# Altium PCB PCB_RB2_My.PcbDoc (part 2 of 2)
Units mm, origin at the board's own origin, x right, y up, seen from the top; angles counter-clockwise.
Board outline 198 x 170 mm, 2 copper layers (Top, Bottom); 107 components, 89 nets, 429 pads, 145 vias.
Unrouted connection lines stored in the file: 100.
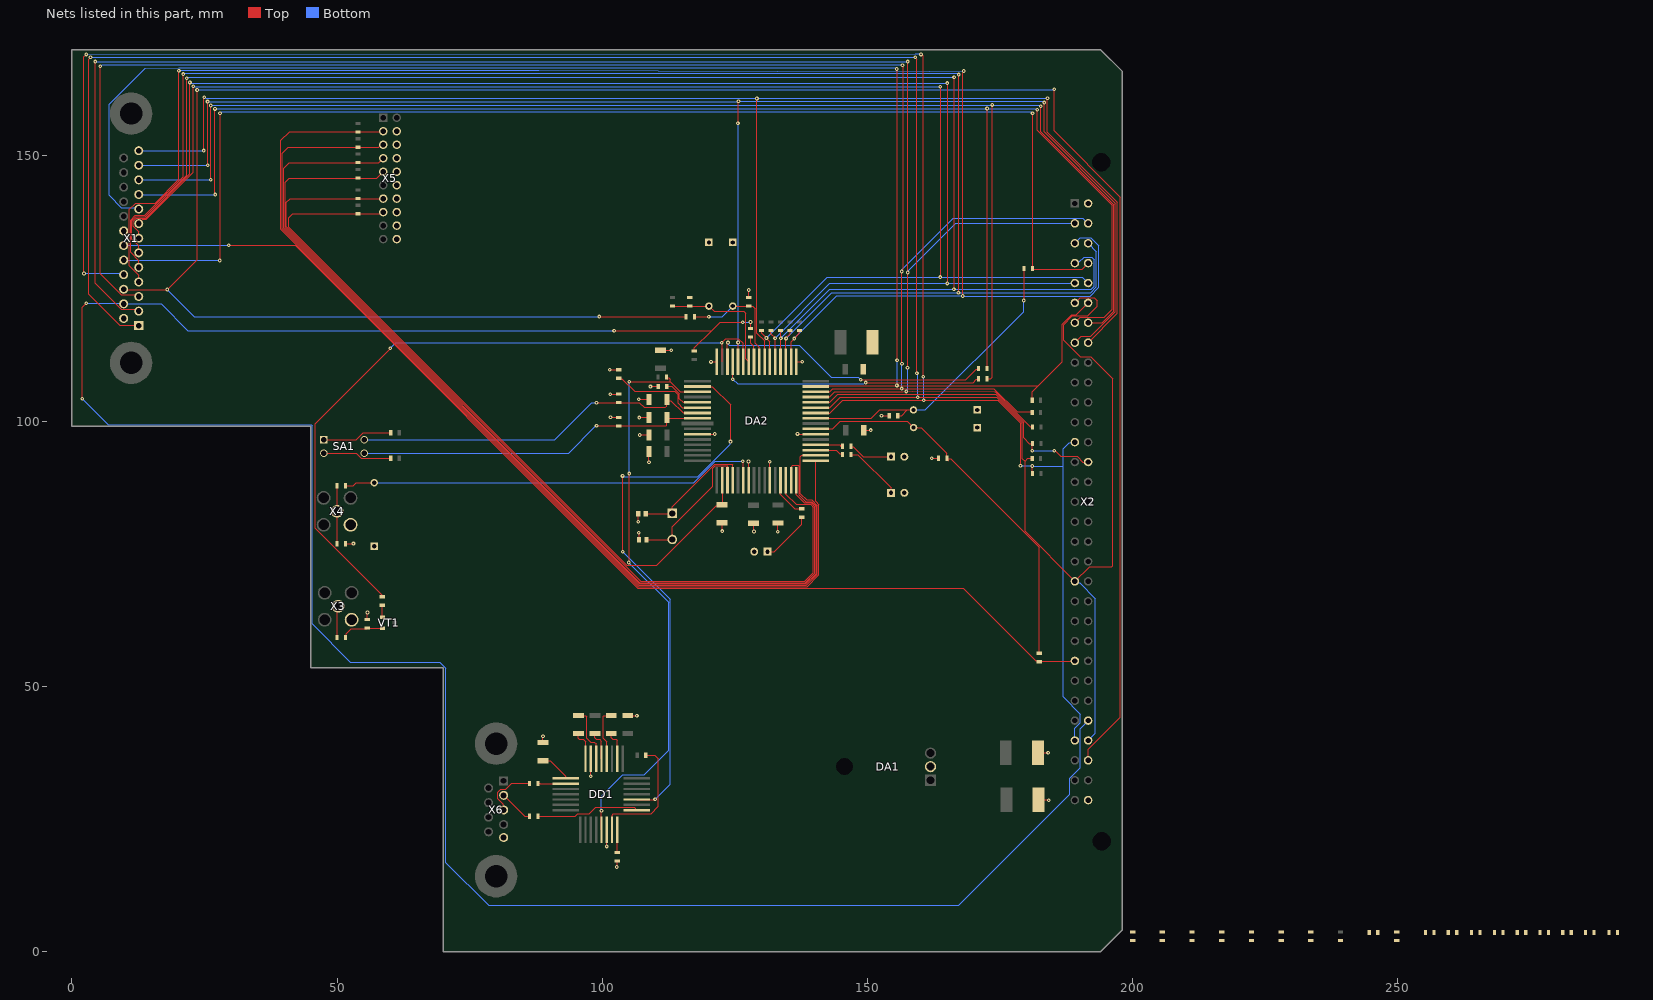
[diagram p2: the nets of this part, all layers, seen from the top]

## Via types
v1: diameter 0.7, hole 0.3, Top to Bottom, 145 vias

## Nets (pads, with @x,y where several pads share a name; then routed paths per layer and width w, separated by ;. In a path a pad name is that pad's centre, name@x,y a point inside that pad or via, vN(x,y) a via of type N, cw(c..) or ccw(c..) an arc to the next point about the centre after c; other vN are vias at no path point) (continued)
"+27В вкл. 2мкс": R13.2 R36.1 X2.24A | length 211.9
  Top w0.125: v1(29.55,133.15) 42.075,133.15 106.7,68.525 168.025,68.525 181.761,54.789 182.236,54.789 R36.1@182.375,54.65 182.45,54.725 189.025,54.725 X2.24A@189.1,54.8
  Bottom w0.125: 9.76,133.125 29.525,133.125 v1(29.55,133.15)
GND: C1.2 C2.2 C3.2 C4.2 C5.2 C6.1 C7.1 C8.2 C9.2 C10.2 C11.2 C12.2 C13.2 C14.2 C15.2 C17.1 C19.1 DA1.2 DA2.3 DA2.15 DA2.19 DA2.30 DA2.41 DA2.56 DD1.2 DD1.15 R22.1 R24.1 R40.2 R41.2 R42.2 R43.2 R51.1 R52.1 R53.1 R54.2 R65.1 VD1.1 VD2.1 VD3.1 VD4.1 VD5.1 VD6.2 VD7.2 VD8.2 X1.20 X2.1B X2.31B X3.2 X4.2 X5.4 X5.6 X5.8 X5.10 X5.12 X5.14 X5.16 X5.18 X5.20 X6.5 | length 62.5
  Top w0.125: R22.1@51.6,76.9 53.05,76.9 v1(53.075,76.925) ; R24.1@55.7,62.6 55.7,63.9 v1(55.725,63.925) ; C17.1@88.8,39.4 88.8,40.55 v1(88.825,40.575) ; DD1.2@97.84,36.35 97.84,33.06 v1(97.85,33.05) ; DD1.15@100.84,22.97 100.84,19.835 v1(100.85,19.825) ; v1(101.4,109.7) R54.2@103.1,109.7 ; v1(101.475,105.075) 101.5,105.1 R52.1@103.1,105.1 ; v1(101.55,100.725) 101.575,100.7 R53.1@103.1,100.7 ; v1(102.75,15.95) 102.8,16 R65.1@102.8,17.1 ; C19.1@104.8,44.5 106.5,44.5 v1(106.525,44.475) ; v1(106.8,81.025) 106.825,81.05 106.825,82.55 C9.2@106.8,82.575 ; v1(106.875,104.125) 106.9,104.1 C6.1@108.8,104.1 ; v1(106.9,78.95) 106.925,78.925 C8.2@106.925,77.65 ; v1(106.95,100.675) 106.975,100.7 C7.1@108.8,100.7 ; v1(107.05,97.4) C10.2@108.8,97.4 ; v1(108.8,92.25) C3.2@108.8,94.3 ; v1(109.075,106.525) 109.1,106.55 R51.1@110.55,106.55 ; C13.2@111,113.4 v1(112.975,113.4) ; DA2.3@117.95,97.55 121.175,97.55 v1(121.2,97.575) ; v1(120.5,111.175) 120.525,111.2 DA2.56@121.6,111.2 ; C15.2@122.601,80.841 122.601,79.299 v1(122.625,79.275) ; v1(127.575,92.4) 127.6,92.375 DA2.15@127.6,88.9 ; R41.2@127.6,123.3 127.6,124.7 v1(127.625,124.725) ; C12.2@128.525,80.775 128.525,79.275 v1(128.6,79.2) ; v1(131.575,92.375) 131.6,92.35 DA2.19@131.6,88.9 ; v1(133.075,79.175) 133.1,79.2 C5.2@133.1,80.8 ; DA2.41@136.6,111.2 137.65,111.2 v1(137.675,111.225) ; v1(136.8,97.6) 136.85,97.55 DA2.30@140.25,97.55 ; C11.2@149.3,98.3 150.6,98.3 v1(150.625,98.325) ; v1(152.65,101.05) 153.9,101.05 R42.2@154.1,101.25 ; v1(162.1,93) R43.2@163.4,93 ; C2.2@182.125,37.5 184.025,37.5 v1(184.05,37.475) ; C1.2@182.225,28.6 184.125,28.6 v1(184.2,28.525)
NetC6_2: C6.2 DA2.63 R52.2 SA1.2 | length 68.5
  Top w0.125: v1(98.9,103.5) R52.2@103.1,103.5 107,103.5 107.9,102.6 111.9,102.6 112.143,102.843 112.143,104.043 C6.2@112.2,104.1 112.432,103.868 112.932,103.868 115.218,101.582 117.918,101.582 DA2.63@117.95,101.55
  Bottom w0.125: SA1.2@55.12,96.5 91,96.5 98,103.5 v1(98.9,103.5)
NetC7_2: C7.2 DA2.64 R53.2 SA1.4 | length 66.6
  Top w0.125: v1(98.925,99.125) 102.575,99.125 102.6,99.1 R53.2@103.1,99.1 112.051,99.1 112.2,99.249 C7.2@112.2,100.7 112.35,100.55 DA2.64@117.95,100.55
  Bottom w0.125: SA1.4@55.12,93.96 93.635,93.96 98.775,99.1 98.9,99.1 v1(98.925,99.125)
NetC8_1: C8.1 DA2.11 ZQ1.2 | length 27.2
  Top w0.125: C8.1@108.325,77.65 108.35,77.675 113.175,77.675 ZQ1.2@113.2,77.7 113.2,80.1 120.825,87.725 120.825,91.14 121.285,91.6 123.552,91.6 123.625,91.527 123.625,88.925 DA2.11@123.6,88.9
NetC9_1: C9.1 DA2.12 ZQ1.1 | length 23.9
  Top w0.125: C9.1@108.2,82.575 113.175,82.575 ZQ1.1@113.2,82.6 113.2,83.869 121.169,91.838 121.188,91.838 121.2,91.85 124.527,91.85 124.6,91.777 DA2.12@124.6,88.9
NetC15_1: C15.1 DA2.10 R57.2 X5.15 | length 137.7
  Top w0.125: X5.15@58.7,139.42 58.418,139.138 53.988,139.138 R57.2@53.95,139.1 41.65,139.1 40.875,138.325 40.875,136.575 104.638,72.812 110.262,72.812 121.462,84.012 122.372,84.012 122.725,84.365 122.725,88.775 DA2.10@122.6,88.9
NetC16_1: C16.1 DD1.28 | length 5.6
  Top w0.125: C16.1@98.6,41.1 98.6,40.3 98.9,40 99.5,40 99.84,39.66 DD1.28@99.84,36.35
NetC17_2: C17.2 DD1.4 | length 6
  Top w0.125: C17.2@88.8,36 90.2,36 93.132,33.068 93.132,32.678 DD1.4@93.15,32.66
NetC18_1: C18.1 DD1.1 | length 10.8
  Top w0.125: C18.1@95.5,44.5 96.9,44.5 97.1,44.3 97.1,40.2 97.8,39.5 98.5,39.5 98.84,39.16 DD1.1@98.84,36.35
NetC18_2: C18.2 DD1.3 | length 5.7
  Top w0.125: C18.2@95.5,41.1 95.5,40.2 95.7,40 96.4,40 96.84,39.56 DD1.3@96.84,36.35
NetC20_1: C20.1 DD1.27 | length 9.8
  Top w0.125: DD1.27@100.84,36.35 100.84,39.56 100.2,40.2 100.2,44.383 100.317,44.5 C20.1@101.7,44.5
NetC20_2: C20.2 DD1.25 | length 5.6
  Top w0.125: C20.2@101.7,41.1 101.7,40.3 102,40 102.6,40 102.84,39.76 DD1.25@102.84,36.35
NetDA2_14: DA2.14 R23.2 VD1.2 | length 80.4
  Top w0.125: R23.2@51.6,87.8 53,87.8 53.6,88.4 VD1.2@57,88.4 ; v1(126.475,92.45) 126.585,92.34 126.585,92.104 126.6,92.089 DA2.14@126.6,88.9
  Bottom w0.125: VD1.2@57,88.4 117.26,88.4 121.31,92.45 v1(126.475,92.45)
NetDA2_21: DA2.21 R50.1 | length 7.8
  Top w0.125: DA2.21@133.6,88.9 133.583,88.883 133.583,86.217 136.3,83.5 R50.1@137.6,83.5
NetDA2_22: DA2.22 R62.2 X5.13 | length 172.1
  Top w0.125: X5.13@58.7,141.96 58.685,141.975 R62.2@53.95,141.975 41.15,141.975 40.45,141.275 40.45,136.638 107.238,69.85 138.214,69.85 139.8,71.436 139.8,83.789 139.289,84.3 136.525,84.3 134.6,86.225 DA2.22@134.6,88.9
NetDA2_23: DA2.23 R58.2 X5.7 | length 186.2
  Top w0.125: X5.7@58.7,149.58 57.87,148.75 R58.2@53.95,148.75 40.98,148.75 39.95,147.72 39.95,136.354 106.979,69.325 138.396,69.325 140.3,71.229 140.3,83.996 139.471,84.825 138.35,84.825 137.1,86.075 137.1,91.475 136.9,91.675 135.875,91.675 135.714,91.514 135.714,89.014 DA2.23@135.6,88.9
NetDA2_24: DA2.24 R59.2 X5.9 | length 175.9
  Top w0.125: X5.9@58.7,147.04 57.51,145.85 R59.2@53.95,145.85 41,145.85 40.2,145.05 40.2,136.475 107.1,69.575 138.293,69.575 140.05,71.332 140.05,83.893 139.368,84.575 138.125,84.575 136.6,86.1 DA2.24@136.6,88.9
NetDA2_25: DA2.25 R60.2 X5.3 | length 188.8
  Top w0.125: X5.3@58.7,154.66 58.59,154.55 R60.2@53.925,154.55 41.039,154.55 39.414,152.925 39.414,136.164 106.754,68.825 138.625,68.825 140.8,71 140.8,84.275 140.2,84.875 140.2,92.5 DA2.25@140.25,92.55
NetDA2_26: DA2.26 R61.2 X5.5 | length 190.5
  Top w0.125: X5.5@58.68,152.1 X5.5@58.7,152.12 58.359,152.12 57.889,151.65 R61.2@53.925,151.65 40.825,151.65 39.7,150.525 39.7,136.25 106.875,69.075 138.5,69.075 140.55,71.125 140.55,84.1 139.475,85.175 138.525,85.175 137.35,86.35 137.35,93.25 137.636,93.536 140.236,93.536 DA2.26@140.25,93.55
NetDA2_27: DA2.27 R48.1 | length 5.4
  Top w0.125: DA2.27@140.25,94.55 144.15,94.55 144.817,93.883 145.117,93.883 R48.1@145.3,93.7
NetDA2_28: DA2.28 R49.1 | length 5.2
  Top w0.125: DA2.28@140.25,95.55 144.75,95.55 145,95.3 R49.1@145.3,95.3
NetDA2_31: DA2.31 R36.2 R43.1 VD5.2 | length 73.8
  Top w0.125: DA2.31@140.25,98.55 143.45,98.55 144.875,99.975 157.525,99.975 VD5.2@158.7,98.8 160.1,98.8 164.986,93.914 R43.1@164.986,93.014 ; R43.1@164.886,93.114 R43.1@164.986,93.014 ; R43.1@164.986,92.857 R43.1@164.986,93.014 ; R43.1@165.237,92.571 165,92.809 R43.1@165,92.904 ; R36.2@182.375,56.25 182.375,76.225 165.696,92.904 R43.1@165,92.904 ; R43.1@164.986,93.014 R43.1@165,93 R43.1@165,92.904
NetDA2_33: DA2.33 R35.2 R42.1 VD4.2 | length 58
  Top w0.125: DA2.33@140.25,100.55 150.75,100.55 152.325,102.125 157.525,102.125 ; R42.1@155.7,101.05 155.725,101.025 156.425,101.025 157.525,102.125 ; VD4.2@158.675,102.125 157.525,102.125 ; v1(179.45,122.75) 179.525,122.825 R35.2@179.525,128.775
  Bottom w0.125: VD4.2@158.675,102.125 160.925,102.125 179.45,120.65 v1(179.45,122.75)
NetDA2_48: DA2.48 R34.2 R41.1 VD3.2 | length 22.8
  Top w0.125: R34.2@117.375,119.7 v1(120.1,119.7) ; VD3.2@124.6,121.7 127.1,121.7 R41.1@127.6,121.7 128.375,121.7 128.85,121.225 128.85,114.7 129.575,113.975 129.575,111.225 DA2.48@129.6,111.2
  Bottom w0.125: v1(120.1,119.7) 122.6,119.7 VD3.2@124.6,121.7
NetDA2_49: DA2.49 R33.2 | length 4.9
  Top w0.125: R33.2@128,115.85 128,114.7 128.6,114.1 DA2.49@128.6,111.2
NetDA2_50: DA2.50 R32.2 R40.1 VD2.2 | length 23.7
  Top w0.125: R32.2@113.25,121.7 R40.1@116.5,121.7 117,121.7 VD2.2@120.1,121.7 121.1,120.7 126.702,120.7 127.038,120.364 127.038,111.762 DA2.50@127.6,111.2
NetDA2_51: DA2.51 R25.1 | length 132.8
  Top w0.125: R25.1@58.614,67.014 R25.1@58.5,66.9 58.386,67.014 58.386,67.314 45.9,79.8 45.9,99.55 60.025,113.675 v1(60.025,113.725) ; 122.6,111.2 122.6,114.75 v1(122.55,114.8) 123.3,115.55 125.648,115.55 126.55,114.648 126.55,111.25 DA2.51@126.6,111.2
  Bottom w0.125: v1(60.025,113.725) 61.1,114.8 v1(122.55,114.8)
NetDA2_53: DA2.53 R31.2 | length 50.4
  Top w0.125: v1(124.6,107.925) DA2.53@124.6,111.2 ; v1(149.675,107.275) 169.95,107.275 170.536,107.861 170.836,107.861 R31.2@170.95,107.975
  Bottom w0.125: v1(124.6,107.925) 125.5,107.025 149.314,107.025 149.564,107.275 v1(149.675,107.275)
NetDA2_54: DA2.54 R30.2 | length 54.9
  Top w0.125: DA2.54@123.6,111.2 123.6,114.725 v1(123.7,114.825) ; v1(148.75,107.8) 148.763,107.813 168.538,107.813 170.536,109.811 170.836,109.811 R30.2@170.95,109.925
  Bottom w0.125: v1(123.7,114.825) 123.81,114.715 123.81,114.397 123.907,114.3 137.125,114.3 143.175,108.25 148.3,108.25 v1(148.75,107.8)
NetDA2_58: DA2.58 DD1.20 | length 107.3
  Top w0.125: v1(103.825,89.675) 103.825,75.4 v1(103.85,75.375) ; DD1.20@106.53,28.66 109.91,28.66 v1(109.95,28.7) ; DA2.58@117.95,106.55 117.975,106.525 120.75,106.525 124.175,103.1 v1(124.175,96.15)
  Bottom w0.125: v1(103.825,89.675) 103.935,89.565 104.176,89.565 104.186,89.555 118.005,89.555 124.136,95.686 124.136,96.111 v1(124.175,96.15) ; v1(103.85,75.375) 112.825,66.4 112.825,31.575 v1(109.95,28.7)
NetDA2_59: DA2.59 DD1.14 R64.1 | length 110.6
  Top w0.125: DD1.14@99.84,22.97 99.825,22.985 99.825,26.525 v1(99.85,26.55) ; v1(105,73.35) 105.075,73.425 v1(105.075,90.125) ; v1(105.075,107.45) 105.1,107.425 112.8,107.425 ; R64.1@112.125,108.155 R64.1@112.362,107.917 ; R64.1@112.125,108.325 112.239,108.211 112.539,108.211 112.8,107.95 112.8,107.425 ; DA2.59@117.95,105.55 114.7,105.55 112.813,107.437 112.8,107.425
  Bottom w0.125: v1(99.85,26.55) 99.85,29.325 103.825,33.3 107.875,33.3 112.525,37.95 112.525,65.825 v1(105,73.35) ; v1(105.075,90.125) v1(105.075,107.45)
NetDA2_61: DA2.61 R51.2 | length 7.5
  Top w0.125: R51.2@112.15,106.55 113.129,106.55 114.55,105.129 114.55,104.262 115.262,103.55 DA2.61@117.95,103.55
NetDA2_62: DA2.62 R54.1 | length 18.1
  Top w0.125: R54.1@103.1,108.1 103.214,107.986 103.714,107.986 106.075,105.625 113.7,105.625 114.3,105.025 114.3,103.35 115.1,102.55 DA2.62@117.95,102.55
NetDD1_5: DD1.5 R66.1 | length 5.3
  Top w0.125: R66.1@87.9,31.7 88.2,31.7 88.24,31.66 DD1.5@93.15,31.66
NetDD1_16: DD1.16 R63.2 | length 23.8
  Top w0.125: DD1.16@101.84,22.97 101.84,25.74 102.1,26 109.2,26 110.55,27.35 110.55,36.333 109.883,37 R63.2@108.2,37
NetDD1_17: DD1.17 R65.2 | length 4.3
  Top w0.125: R65.2@102.8,18.7 102.84,18.74 DD1.17@102.84,22.97
NetDD1_18: DD1.18 R67.1 | length 19.6
  Top w0.125: R67.1@87.9,25.5 94.9,25.5 95.4,26 97.55,26 98.75,27.2 105.99,27.2 DD1.18@106.53,26.66
NetR1_1: R1.1 X1.1
NetR2_1: R2.1 X1.2
NetR3_1: R3.1 X1.3
NetR4_1: R4.1 X1.4
NetR5_1: R5.1 X1.5
NetR6_1: R6.1 X1.6
NetR7_1: R7.1 X1.7
NetR8_1: R8.1 X1.8
NetR9_1: R9.1 X1.9
NetR10_1: R10.1 X1.10
NetR11_1: R11.1 X1.11
NetR12_1: R12.1 X1.12
NetR13_1: R13.1 X1.13
NetR14_1: R14.1 X1.14
NetR15_1: R15.1 X1.15
NetR16_1: R16.1 X1.16
NetR17_1: R17.1 X1.17
NetR18_1: R18.1 X1.18
NetR19_1: R19.1 X1.19
NetR21_1: R21.1 X3.1 | length 5.8
  Top w0.125: R21.1@50,59.2 X3.1@50,65
NetR21_2: R21.2 R24.2 VT1.3 | length 8
  Top w0.125: R21.2@51.6,59.2 51.715,59.315 51.715,59.915 52.7,60.9 55.6,60.9 R24.2@55.7,61 VT1.3@58.55,61
NetR22_2: R22.2 R23.1 X4.1 | length 10.9
  Top w0.125: R22.2@50,76.9 X4.1@50,83 R23.1@50,87.8
NetR25_2: R25.2 VT1.2 | length 2.3
  Top w0.125: VT1.2@58.55,63 R25.2@58.55,65.3
NetR48_2: R48.2 VD8.1 | length 11.1
  Top w0.125: R48.2@146.9,93.7 148.175,93.7 154.45,87.425 VD8.1@154.45,86.5
NetR49_2: R49.2 VD7.1 | length 8.4
  Top w0.125: R49.2@146.9,95.3 147.014,95.186 147.314,95.186 149.2,93.3 VD7.1@154.45,93.3
NetR50_2: R50.2 VD6.1 | length 9.9
  Top w0.125: VD6.1@131.15,75.4 132.45,75.4 137.6,80.55 R50.2@137.6,81.9
NetR55_1: R55.1 SA1.1 | length 13.3
  Top w0.125: SA1.1@47.5,96.5 53.6,96.5 54.9,97.8 R55.1@60.3,97.8
NetR56_1: R56.1 SA1.3 | length 13.4
  Top w0.125: SA1.3@47.5,93.96 53.64,93.96 54.565,93.035 60.1,93.035 60.3,92.835 R56.1@60.3,92.7
NetR66_2: R66.2 X6.3 | length 10.5
  Top w0.125: X6.3@81.4,26.7 81.336,26.764 81.336,27.733 80.3,28.769 80.3,30 80.876,30.576 81.794,30.576 82.475,31.257 82.475,31.275 82.9,31.7 R66.2@86.3,31.7
NetR67_2: R67.2 X6.2 | length 6.5
  Top w0.125: X6.2@81.4,29.45 85.35,25.5 R67.2@86.3,25.5
"Внеш. зап. 15В": R10.2 R34.1 X2.29B | length 444.1
  Top w0.125: 9.76,124.875 9.81,124.825 v1(18,124.825) 23.625,130.45 23.625,162.425 v1(23.6,162.45) ; v1(99.45,119.725) 99.475,119.7 R34.1@115.775,119.7 ; v1(185.225,162.6) 185.175,162.55 185.175,154.725 197.688,142.212 197.688,44.188 191.6,38.1 X2.29B@191.6,36.05
  Bottom w0.125: v1(18,124.825) 23.1,119.725 v1(99.45,119.725) ; v1(23.6,162.45) 184.919,162.45 185.069,162.6 v1(185.225,162.6)
"Внеш. зап. лог. 1": DA2.34 R11.2 R20.1 X2.13A X2.28A | length 390.6
  Top w0.125: v1(2.275,127.85) 2.275,168.668 2.7,169.093 v1(2.7,169.15) ; DA2.34@140.25,101.55 140.275,101.525 142.9,101.525 145.312,103.937 160.587,103.937 v1(160.6,103.95) 160.625,103.925 174.611,103.925 174.647,103.888 178.925,99.611 178.925,91.65 v1(178.85,91.575) ; v1(160.084,169.15) 160.194,169.04 160.47,169.04 160.55,168.96 160.55,108.425 v1(160.525,108.4) ; v1(181.075,91.55) 181.05,91.525 181.05,90.175 R20.1@181.1,90.125
  Bottom w0.125: v1(2.275,127.85) 9.535,127.85 9.76,127.625 ; v1(2.7,169.15) 159,169.237 ; 159,169.238 159.03,169.238 ; 159.031,169.237 159.997,169.237 v1(160.084,169.15) ; v1(160.525,108.4) 160.6,108.325 v1(160.6,103.95) ; v1(178.85,91.575) 178.875,91.55 181.025,91.55 181.05,91.525 186.9,91.525 ; X2.28A@189.1,39.8 189.1,42.062 190.152,43.114 190.152,44.76 186.9,48.012 186.9,91.525 ; X2.13A@189.1,96.05 188.993,95.943 188.068,95.943 186.9,94.775 186.9,91.525
"Имп. 0": DA2.37 R1.2 R29.1 X2.2A | length 347.7
  Top w0.125: v1(4.4,167.8) 4.4,126.018 9.33,121.087 11.739,121.087 11.775,121.051 12.299,121.051 12.6,120.75 ; DA2.37@140.25,104.55 140.289,104.589 142.864,104.589 143.862,105.587 156.725,105.587 v1(157.325,105.613) ; v1@157.313,105.587 v1(157.325,105.613) ; v1(157.55,110.05) 157.575,110.075 v1(157.575,128.025) 157.6,128.05 v1(157.6,167.8) ; R29.1@181.1,98.9 181.05,98.95 180.646,98.95 174.058,105.538 174.021,105.575 158.427,105.612 ccw(c158.425,105.075) 158.404,105.612 157.466,105.575 157.363,105.575 v1(157.325,105.613) ; X2.2A@189.1,137.3 X2.2A@189.499,137.3
  Bottom w0.125: v1(4.4,167.8) 4.46,167.74 157.54,167.74 v1(157.6,167.8) ; v1(157.325,105.613) 157.325,105.723 157.575,105.973 157.575,110.025 v1(157.55,110.05) ; v1(157.575,128.025) 157.685,128.135 157.685,128.385 166.6,137.3 X2.2A@189.1,137.3
"Имп. 1": DA2.38 R14.2 R37.1 X2.2B | length 343.3
  Top w0.125: v1(5.35,166.912) 5.35,127.818 9.33,123.837 11.739,123.837 11.775,123.801 12.299,123.801 12.6,123.5 ; DA2.38@140.25,105.55 140.261,105.539 142.864,105.539 143.475,106.15 v1(156.475,106.15) 173.8,106.15 178.211,101.739 180.936,101.739 R37.1@181.05,101.625 ; v1(156.5,110.825) 156.5,128.188 v1(156.463,128.225) 156.463,128.381 156.775,128.693 156.775,166.769 156.6,166.944 v1(156.6,167.1) ; R37.1@180.911,101.639 R37.1@180.95,101.6
  Bottom w0.125: v1(5.35,166.912) 5.506,166.912 5.756,167.163 156.537,167.163 v1(156.6,167.1) ; v1@156.46,128.56 166.188,138.288 190.612,138.288 X2.2B@191.6,137.3 ; v1(156.475,106.15) 156.475,110.8 v1(156.5,110.825)
"Имп. 1 ПРД 1к": R6.2 R30.1 X2.7A | length 286.4
  Top w0.125: v1(26.975,158.875) 26.975,142.775 v1(27.025,142.725) ; R30.1@172.55,109.95 v1(172.55,158.95) ; v1@182,158.775 v1(182,158.725) 182,154.85 196.161,140.689 196.161,140.586 196.15,140.575 196.15,121.1 194.65,119.6 190.15,119.6 X2.7A@189.1,118.55
  Bottom w0.125: 12.6,142.75 12.625,142.725 v1(27.025,142.725) ; v1(26.975,158.875) 27.043,158.943 181.639,158.943 181.857,158.725 v1(182,158.725)
"Имп. 1 ПРД 2к": R19.2 R31.1 X2.7B | length 286.8
  Top w0.125: v1(26.175,145.5) v1(26.175,159.525) ; R31.1@172.55,107.975 173.2,107.975 173.525,108.3 173.525,159.6 v1(173.5,159.625) ; v1@182.675,159.45 v1(182.675,159.4) 182.675,154.575 196.43,140.82 196.43,120.755 194.225,118.55 X2.7B@191.6,118.55
  Bottom w0.125: 12.6,145.5 v1(26.175,145.5) ; v1(26.175,159.525) 26.237,159.587 182.332,159.587 182.519,159.4 v1(182.675,159.4)
"Имп. 2": DA2.42 R2.2 R39.1 X2.3A | length 318.8
  Top w0.125: 12.6,126.25 12.6,127.533 10.812,129.32 10.812,139.912 12,141.1 15.675,141.1 20.175,145.6 v1(20.175,166.087) ; DA2.42@135.6,111.2 135.6,115 136.175,115.575 v1(136.2,115.575) 137.168,116.543 137.168,116.863 137.4,117.095 R39.1@137.4,117.1 ; v1(167.975,123.6) 167.975,165.719 168.125,165.869 v1(168.125,166.025)
  Bottom w0.125: v1(20.175,166.087) 20.25,166.162 88.001,166.162 88.039,166.124 155.498,165.863 ccw(c155.5,166.4) 155.509,165.863 167.959,166.087 168.062,166.087 168.099,166.051 v1(168.125,166.025) ; v1(136.2,115.575) 136.2,115.675 144.163,123.637 167.938,123.637 v1(167.975,123.6) 192,123.6 193.625,125.225 193.625,133.1 192.123,134.602 190.152,134.602 X2.3A@189.1,133.55
"Имп. 3": DA2.43 R15.2 R44.1 X2.3B | length 307.3
  Top w0.125: 12.6,129 12.6,130.283 11.062,131.82 11.062,137.887 11.963,138.788 13.716,138.788 20.975,146.046 v1(20.975,165.45) ; DA2.43@134.6,111.2 v1@134.6,115.6 ; v1@134.6,115.7 135.4,116.5 R44.1@135.4,117.1 ; v1(167.15,124.225) 167.2,124.275 v1(167.2,165.35)
  Bottom w0.125: v1(20.975,165.45) 21.085,165.56 21.308,165.56 21.336,165.587 166.839,165.587 167.077,165.35 v1(167.2,165.35) ; v1(134.65,115.6) 143.275,124.225 v1(167.15,124.225) 167.175,124.2 192.064,124.2 193.175,125.311 193.175,131.975 X2.3B@191.6,133.55
"Имп. 3МГц": DA2.35 R5.2 R26.1 X2.6A X2.20A X2.28B | length 458.8
  Top w0.125: v1(3.5,168.6) 3.5,168.543 3.2,168.243 3.2,123.95 9.05,118.1 12.5,118.1 12.6,118 ; DA2.35@140.25,102.55 142.9,102.55 144.837,104.487 159.437,104.487 v1(159.475,104.525) 159.513,104.487 160.595,104.487 160.602,104.488 174.414,104.475 174.451,104.438 179.2,99.689 179.2,92.95 179.7,92.45 ; v1(159,168.6) 159,168.543 159.3,168.243 159.3,168 159.3,109.075 v1(159.325,109.05) ; R26.1@181.05,92.95 181,93 180.25,93 179.7,92.45 ; X2.6A@189.1,122.3 190.088,123.288 192.737,123.288 193.3,122.725 193.3,121.65 191.5,119.85 188.625,119.85 186.977,118.202 186.977,115.298 190.1,112.175 192.075,112.175 196.225,108.025 196.225,72.723 196.064,72.562 191.862,72.562 X2.20A@189.1,69.8 189.1,69.854 179.7,79.254 179.7,92.45
  Bottom w0.125: v1(3.5,168.6) v1(159,168.6) ; v1(159.325,109.05) 159.325,108.894 159.475,108.744 v1(159.475,104.525) ; X2.20A@189.1,69.8 189.358,69.542 189.983,69.542 192.975,66.55 192.975,41.175 X2.28B@191.6,39.8
"Имп. 3МГц инв.": DA2.36 R28.1 X2.14B | length 59.9
  Top w0.125: DA2.36@140.25,103.55 140.275,103.575 142.875,103.575 144.375,105.075 158.425,105.075 174.168,105.075 179.45,99.793 179.45,96.85 180.525,95.775 R28.1@181.1,95.775 181.1,95.275 181.075,95.25 v1(181.075,94.45) ; v1(185.225,94.45) 185.275,94.4 185.425,94.4 186.473,93.352 189.536,93.352 190.588,92.3 X2.14B@191.6,92.3
  Bottom w0.125: v1@181.025,94.45 v1(181.075,94.45) v1(185.225,94.45)
"Имп. 4": DA2.44 R3.2 R45.1 X2.4A | length 301.9
  Top w0.125: 12.6,131.75 12.6,133.033 11.312,134.32 11.312,137.783 12.067,138.538 13.82,138.538 21.625,146.343 v1(21.625,164.65) ; DA2.44@133.6,111.2 133.6,113.7 R45.1@133.6,117.1 ; v1(166.3,124.9) 166.3,164.825 v1@166.3,164.85 ; v1@166.3,164.8 v1(166.325,164.825)
  Bottom w0.125: v1(21.625,164.65) 21.781,164.65 21.956,164.825 v1(166.325,164.825) ; v1(133.675,115.65) 142.925,124.9 v1(166.3,124.9) 166.325,124.875 192.203,124.875 192.796,125.468 192.796,130.404 192.275,130.925 190.825,130.925 189.958,130.058 189.358,130.058 X2.4A@189.1,129.8
"Имп. 5": DA2.45 R17.2 R46.1 X2.5A | length 282.9
  Top w0.125: 12.6,134.5 12.6,135.675 11.562,136.713 11.562,137.68 12.17,138.288 13.923,138.288 22.25,146.614 v1(22.25,163.875) v1@22.25,163.9 ; R46.1@131.8,117.1 131.8,116.5 v1@132.6,115.7 ; DA2.45@132.6,111.2 v1@132.6,115.65 ; v1(165.05,125.975) v1(165.05,163.75)
  Bottom w0.125: v1(22.25,163.875) 22.406,163.875 22.531,163.75 v1(165.05,163.75) ; v1(132.575,115.65) 142.9,125.975 v1(165.05,125.975) 189.025,125.975 X2.5A@189.1,126.05
"Имп. 6": DA2.46 R4.2 R47.1 X2.5B | length 279.7
  Top w0.125: 12.6,137.25 13.387,138.037 14.027,138.037 22.9,146.911 v1(22.9,163.15) ; R47.1@130,117.1 130.032,117.068 130.032,116.568 131.6,115 DA2.46@131.6,111.2 ; v1(163.7,127.175) v1(163.7,163.05) v1@163.7,163.075
  Bottom w0.125: v1(22.9,163.15) 23,163.05 v1(163.7,163.05) ; v1(130.95,115.675) 142.45,127.175 v1(163.7,127.175) 190.475,127.175 X2.5B@191.6,126.05
"Имп. ПЗ АПД": DA2.39 R18.2 R38.1 X2.6B | length 300.3
  Top w0.125: DA2.39@140.25,106.55 140.375,106.675 155.487,106.675 v1(155.55,106.737) ; v1(155.5,166.4) 155.6,166.3 155.6,111.525 v1(155.575,111.5) ; v1@155.55,106.75 155.6,106.7 182.2,106.7 ; R38.1@181.05,103.95 181.025,103.975 181.025,105.525 182.2,106.7 ; X2.6B@191.6,122.3 189.4,120.1 188.521,120.1 186.725,118.304 186.725,111.225 182.2,106.7
  Bottom w0.125: 12.6,140 12.375,140.225 9.325,140.225 6.992,142.558 6.992,159.735 13.846,166.588 20.172,166.625 cw(c20.175,166.087) 20.174,166.625 ; 20.175,166.625 155.275,166.625 v1(155.5,166.4) ; v1(155.55,106.737) 155.575,106.762 v1(155.575,111.5)
Лог.1: R9.2 R27.1 R33.1 X2.27B | length 446
  Top w0.125: v1(1.925,104.25) 1.925,121.45 v1(2.7,122.225) ; v1(102.225,117.05) 102.25,117.075 120.6,117.075 ; R27.1@117.325,113.225 117.325,113.8 120.6,117.075 ; v1(126.488,118.675) 122.2,118.675 120.6,117.075 ; R33.1@127.95,117.45 128.036,117.536 128.036,118.614 v1(127.95,118.7)
  Bottom w0.125: v1(1.925,104.25) 6.863,99.312 45.129,99.312 45.312,99.129 45.312,61.788 52.525,54.575 69.367,54.575 70.525,53.417 70.525,16.775 78.6,8.7 167.2,8.7 188.112,29.613 188.112,32.709 190.088,34.684 190.088,42.037 X2.27B@191.6,43.55 ; v1(2.7,122.225) 9.66,122.225 9.76,122.125 16.8,122.125 21.875,117.05 v1(102.225,117.05) ; v1(126.488,118.675) 126.5,118.687 127.938,118.687 v1(127.95,118.7)
"Призн. 1мкс": DA2.52 R7.2 X2.8A | length 287.2
  Top w0.125: v1@25.575,160.3 v1(25.575,160.262) 25.575,148.3 25.6,148.275 v1(25.6,148.25) ; v1(125.575,156.175) 125.675,156.275 v1(125.675,160.3) ; DA2.52@125.6,111.2 v1(125.6,114.838) ; v1(183.35,160.075) 183.325,160.05 183.325,154.525 196.744,141.106 196.744,120.619 192.125,116 190.3,116 X2.8A@189.1,114.8
  Bottom w0.125: 12.6,148.25 v1(25.6,148.25) ; v1(25.575,160.262) 125.637,160.262 v1(125.675,160.3) 182.969,160.3 183.194,160.075 v1(183.35,160.075) ; v1(125.575,156.175) 125.587,156.162 125.587,114.85 v1(125.6,114.838)
"Призн. 2мкс": DA2.47 R8.2 X2.8B | length 285.7
  Top w0.125: v1@24.85,161.025 v1@24.85,160.975 ; v1(24.875,151.025) 24.85,151.05 v1@24.85,160.975 ; v1(24.95,161.075) v1@24.85,160.975 ; v1(129.15,160.838) 129.15,116.575 130.6,115.125 DA2.47@130.6,111.2 ; v1(183.95,160.9) 183.925,160.875 183.925,154.461 197.123,141.263 197.123,120.323 X2.8B@191.6,114.8
  Bottom w0.125: 12.6,151 12.625,151.025 v1(24.875,151.025) ; v1(24.95,161.075) 25.106,161.075 25.268,160.913 25.298,160.913 25.361,160.85 129.138,160.85 v1(129.15,160.838) ; v1@129.15,160.775 129.244,160.869 183.919,160.869 v1(183.95,160.9)
Режим: R16.2 R35.1 X2.4B | length 239.6
  Top w0.125: v1(27.875,130.3) 27.925,130.35 v1(27.925,158.075) ; R35.1@181.05,128.775 181.125,128.85 v1(181.125,158.075) ; R35.1@181.186,128.661 190.461,128.661 X2.4B@191.6,129.8
  Bottom w0.125: 9.76,130.375 27.8,130.375 v1(27.875,130.3) ; v1(27.925,158.075) 28.036,158.075 28.286,158.325 180.764,158.325 181.014,158.075 v1(181.125,158.075)
pads on no net: DA1.4 DA2.1 DA2.2 DA2.6 DA2.7 DA2.8 DA2.9 DA2.13 DA2.17 DA2.18 DA2.32 DA2.55 DA2.60 DD1.6 DD1.7 DD1.8 DD1.9 DD1.10 DD1.11 DD1.12 DD1.13 DD1.19 DD1.21 DD1.22 DD1.23 DD1.24 DD1.29 DD1.30 X1.22 X1.23 X1.24 X1.25 X1.26 X1.27 X2.1 X2.1A X2.2 X2.9A X2.9B X2.10A X2.10B X2.11A X2.11B X2.12A X2.12B X2.13B X2.14A X2.15A X2.15B X2.16A X2.16B X2.17A X2.17B X2.18A X2.18B X2.19A X2.19B X2.20B X2.21A X2.21B X2.22A X2.22B X2.23A X2.23B X2.25A X2.25B X2.26A X2.26B X2.27A X2.29A X2.31A X3.3 X3.4 X3.5 X4.3 X4.4 X4.5 X5.11 X5.17 X5.19 X6.1 X6.4 X6.6 X6.7 X6.8 X6.9 X6.10 X6.11